# Altium PCB High_v3.PcbDoc
Units mm, origin at the board's own origin, x right, y up, seen from the top; angles counter-clockwise.
Board outline 56.79 x 56.79 mm, 2 copper layers (Top Layer, Bottom Layer); 36 components, 47 nets, 132 pads, 37 vias.
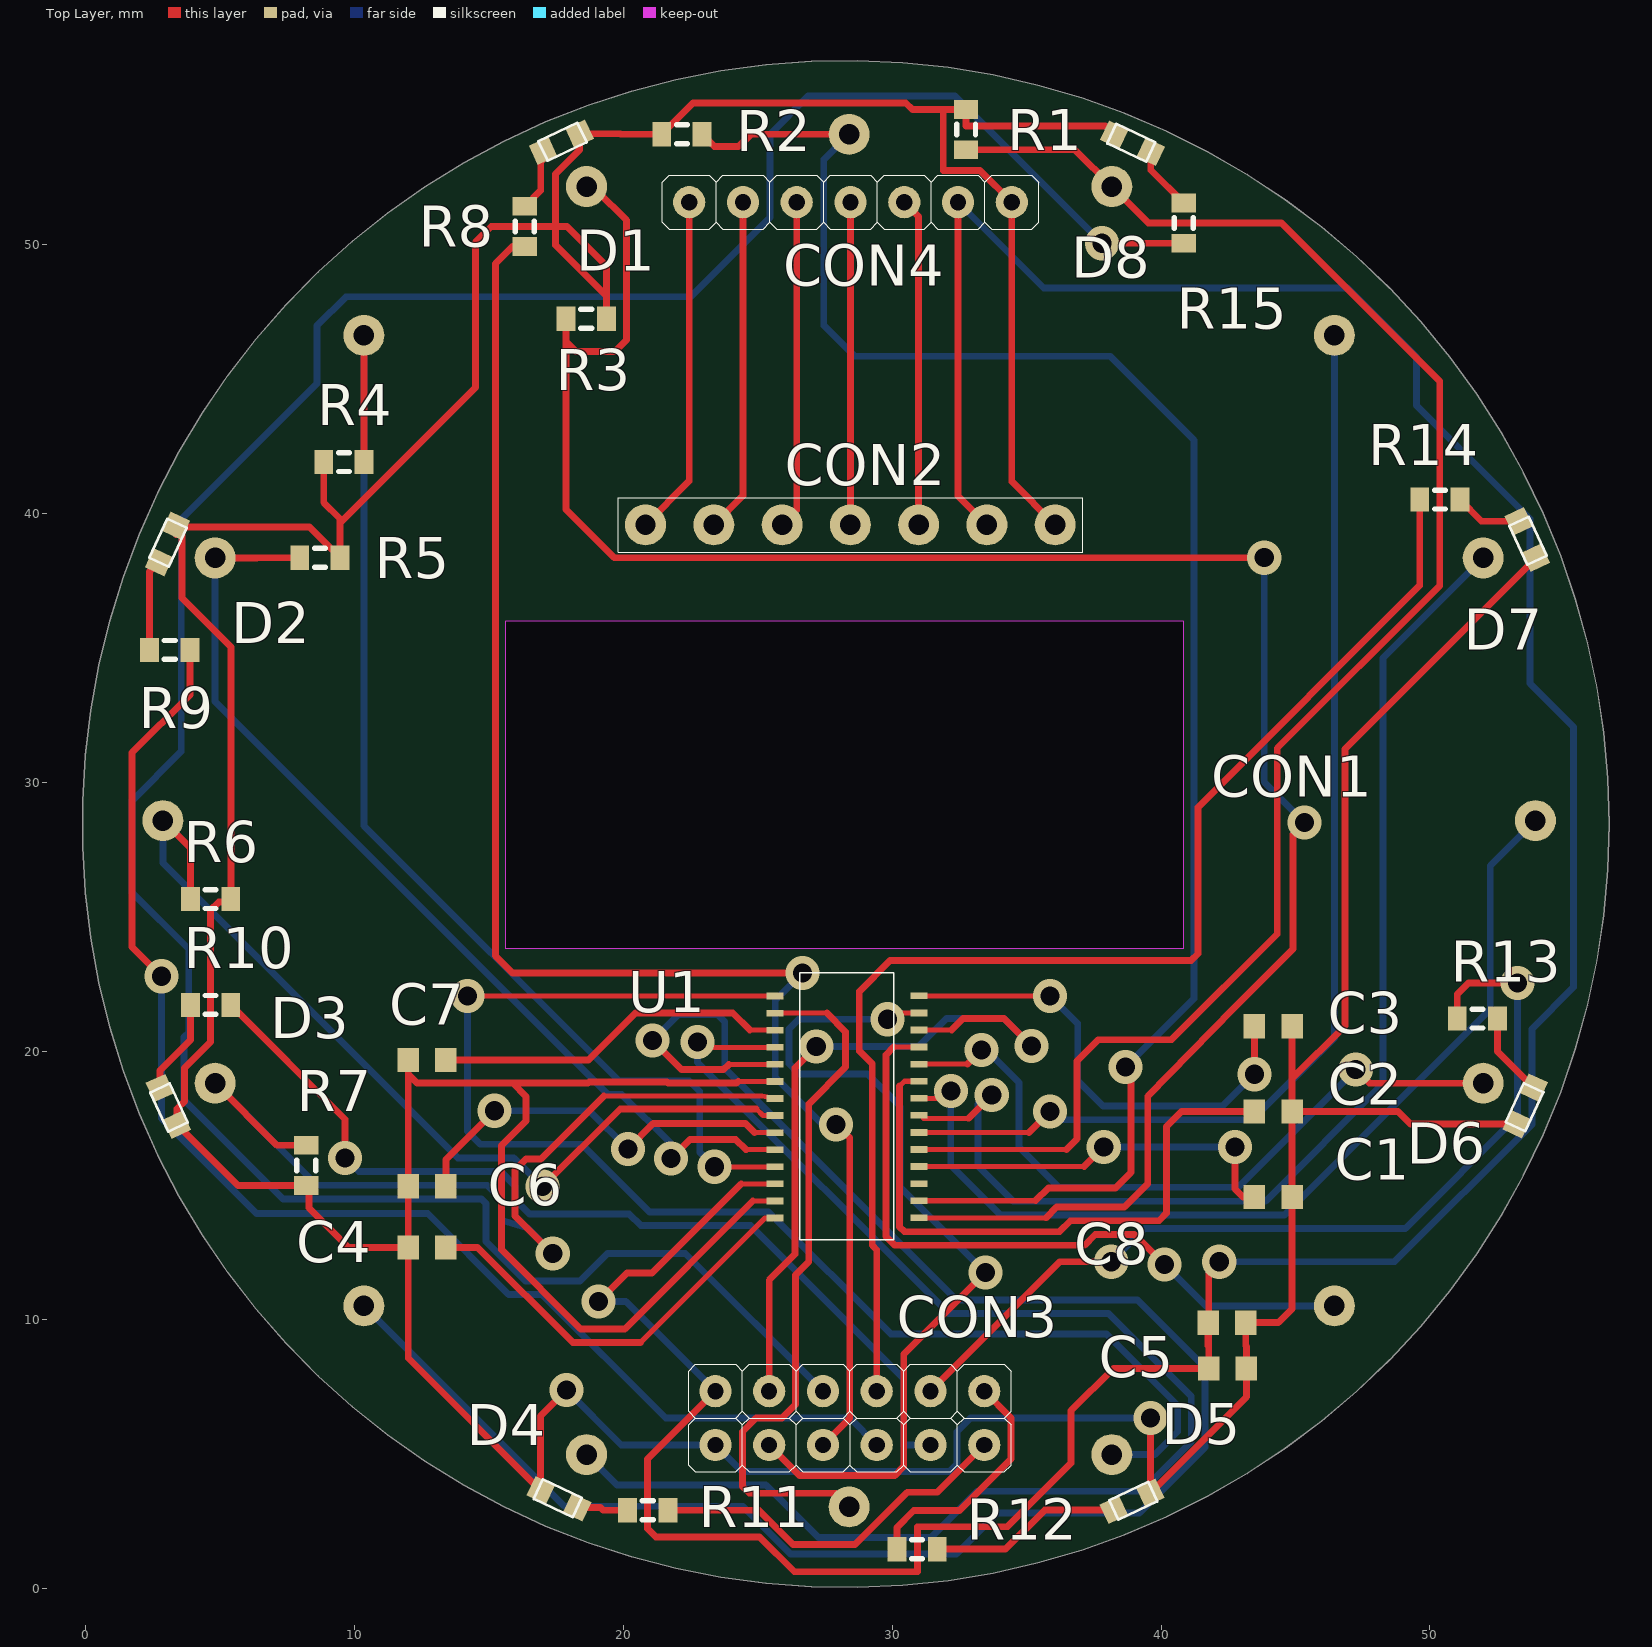
[diagram p0: Top Layer view]
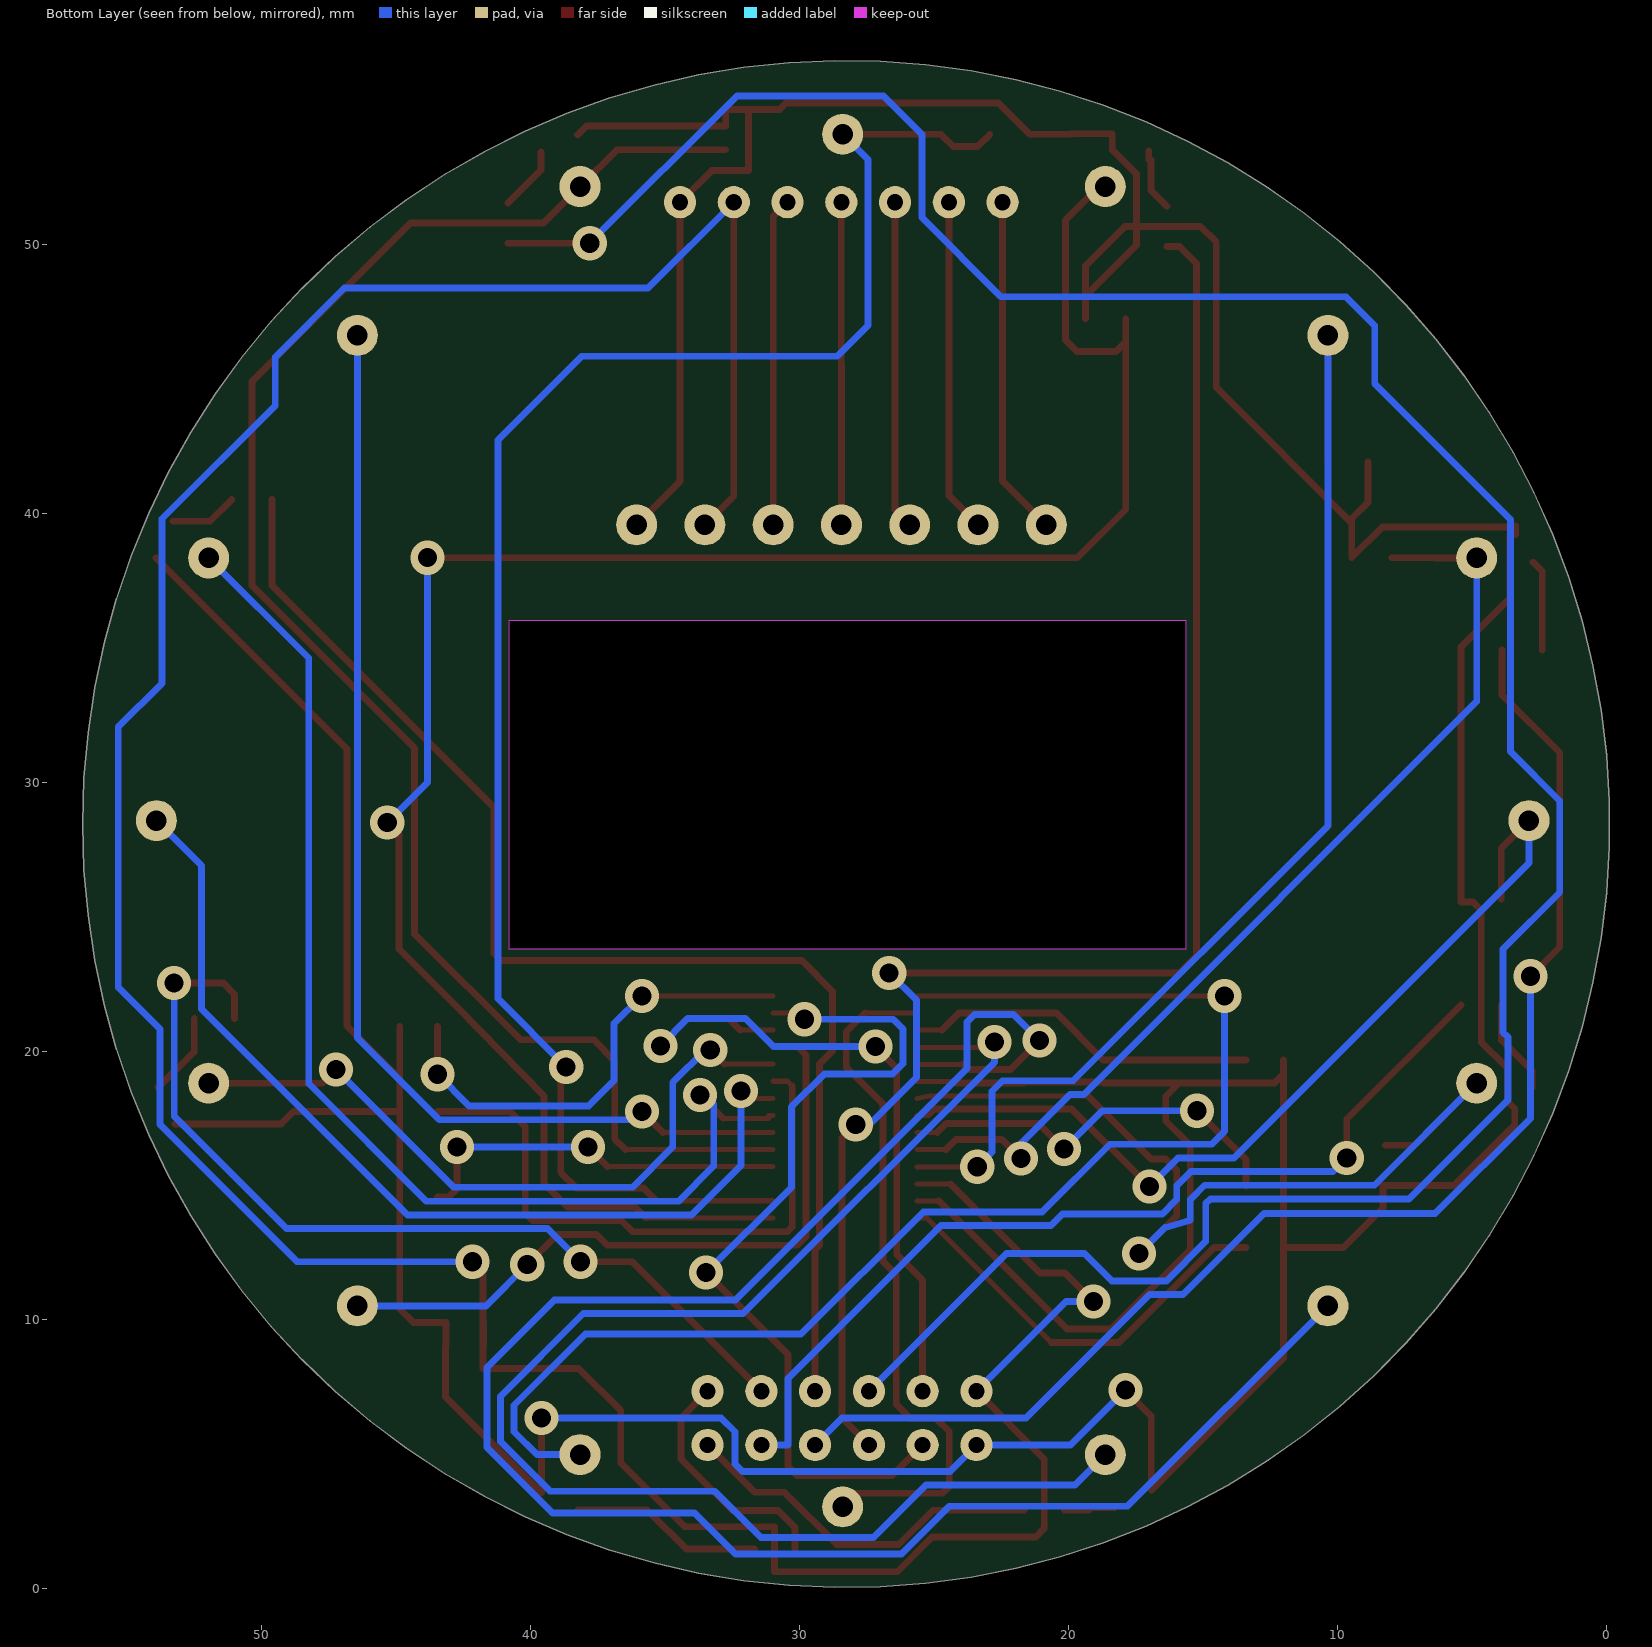
[diagram p1: Bottom Layer view, seen from below]

## Layer stack, top to bottom
Top Solder: solder mask 0.0102, Solder Resist, Dk 3.5
Top Layer: signal copper 0.0356
Dielectric 1: dielectric 0.32, FR-4, Dk 4.8
Bottom Layer: signal copper 0.0356
Bottom Solder: solder mask 0.0102, Solder Resist, Dk 3.5

## Board outline
56.673,28.448 56.622,30.146 56.47,31.839 56.217,33.519 55.863,35.181 55.411,36.819 54.862,38.427 54.218,39.999 53.48,41.53 52.653,43.014 51.738,44.446 50.739,45.821 49.66,47.133 48.504,48.379 47.276,49.553 45.98,50.652 44.621,51.671 43.202,52.607 41.731,53.457 40.211,54.217 38.649,54.885 37.049,55.458 35.418,55.934 33.761,56.313 32.085,56.591 30.395,56.769 28.698,56.845 26.999,56.819 25.304,56.692 23.621,56.464 21.953,56.136 20.309,55.708 18.693,55.183 17.111,54.563 15.569,53.848 14.073,53.043 12.628,52.15 11.238,51.172 9.91,50.112 8.647,48.975 7.454,47.765 6.336,46.485 5.297,45.141 4.34,43.737 3.468,42.278 2.685,40.77 1.994,39.218 1.397,37.627 0.896,36.003 0.494,34.353 0.19,32.681 -0.013,30.994 -0.114,29.298 -0.114,27.598 -0.013,25.902 0.19,24.215 0.494,22.543 0.896,20.893 1.397,19.269 1.994,17.678 2.685,16.126 3.468,14.618 4.34,13.159 5.297,11.755 6.336,10.411 7.454,9.131 8.647,7.921 9.91,6.784 11.238,5.724 12.628,4.746 14.073,3.853 15.569,3.048 17.111,2.333 18.693,1.713 20.309,1.188 21.953,0.76 23.621,0.432 25.304,0.204 26.999,0.077 28.698,0.051 30.395,0.127 32.085,0.305 33.761,0.583 35.418,0.961 37.049,1.438 38.649,2.011 40.211,2.679 41.731,3.439 43.202,4.289 44.621,5.225 45.98,6.244 47.276,7.343 48.504,8.517 49.66,9.763 50.739,11.075 51.738,12.45 52.653,13.882 53.48,15.366 54.218,16.897 54.862,18.469 55.411,20.077 55.863,21.715 56.217,23.377 56.47,25.057 56.622,26.75
cut-out: 15.625,23.8 15.625,36 40.825,36 40.825,23.8

## Design rules (kind name [scope] priority, off if disabled: settings)
Clearance [All] p1: gap=0.254
PolygonConnect [All] p1: connectstyle=Relief reliefconductorwidth=0.254 reliefentries=4 polygonreliefangle="90 Angle" airgapwidth=0.254
RoutingVias [All] p1: holewidth=0.711 width=1.27 viastyle="Through Hole" minholewidth=0.711 minwidth=1.27 maxholewidth=0.711 maxwidth=1.27
SMDNeckDown [All] p1: percent=75.000
SolderMaskExpansion [All] p1: expansion=0.102
Width [All] p1: maxlimit=0.254 minlimit=0.254 preferedwidth=0.254
29 further rules are at their usual default settings.

## Components (designator, comment, footprint, x,y, rotation, side; value= is the part's Value field where it differs from the comment)
C1 "Cap Semi" 1608[0603] 44.175,14.575 r180 top
C2 "Cap Semi" 1608[0603] 44.175,17.75 r180 top
C3 "Cap Semi" 1608[0603] 44.175,20.925 r180 top
C4 "Cap Semi" 1608[0603] 12.7,12.7 r180 top
C5 "Cap Semi" 1608[0603] 42.45,9.9 r180 top
C6 "Cap Semi" 1608[0603] 12.7,14.975 r0 top
C7 "Cap Semi" 1608[0603] 12.7,19.675 r0 top
C8 "Cap Semi" 1608[0603] 42.475,8.2 r180 top
CON1 "RoundSensorCon" RoundSensorCon 28.4,28.575 r0 top
CON2 "OLED" OLED 20.825,39.575 r0 top
CON3 "PIPE" PIPE_SMALL 28.425,6.35 r0 top
CON4 "OLED" OLED_SNMALL 28.45,51.575 r0 top
D1 "LED2" LED0603 16.843,53.848 r25 top
D2 "LED2" LED0603 2.365,38.354 r65 top
D3 "LED2" LED0603 3.127,18.796 r295 top
D4 "LED2" LED0603 18.113,2.667 r155 top
D5 "LED2" LED0603 38.075,3.3 r25 top
D6 "LED2" LED0603 54.225,18.475 r245 top
D7 "LED2" LED0603 53.673,39.878 r295 top
D8 "LED2" LED0603 39.449,53.086 r155 top
R1 "Res3" J1-0603 32.75,54.275 r270 top
R2 "Res3" J1-0603 22.177,54.102 r0 top
R3 "Res3" J1-0603 18.621,47.244 r180 top
R4 "Res3" J1-0603 9.604,41.91 r0 top
R5 "Res3" J1-0603 8.715,38.354 r180 top
R6 "Res3" J1-0603 4.651,25.654 r180 top
R7 "Res3" J1-0603 8.207,15.748 r90 top
R8 "Res3" J1-0603 16.335,50.673 r90 top
R9 "Res3" J1-0603 3.127,34.925 r180 top
R10 "Res3" J1-0603 4.651,21.717 r180 top
R11 "Res3" J1-0603 20.907,2.921 r180 top
R12 "Res3" J1-0603 30.925,1.475 r0 top
R13 "Res3" J1-0603 51.768,21.209 r0 top
R14 "Res3" J1-0603 50.371,40.513 r0 top
R15 "Res3" J1-0603 40.846,50.8 r90 top
U1 "TTP229-BSF" SSOP-28 31,13.8 r180 top

## Footprints (in the part's own frame and the unit in brackets; to place one, negate y for a bottom-side part, rotate by r counter-clockwise, add the part's x,y. Pads: shape width x height; smd on the part's side, far side on the other; paste and mask are expansions set on the pad)
1608[0603] [mm] "Chip Capacitor, Body 1.6x0.8mm, IPC High Density"
  rect 0.8x0.9 smd: 1(-0.7,0) 2(0.7,0)
  body extent -0.87,-0.48 0.87,0.48, height 1.3
J1-0603 [mm] "Chip Resistor, Body 1.6x0.8mm, IPC High Density"
  rect 0.7x0.9 smd: 1(-0.75,0) 2(0.75,0)
  silkscreen extent -0.2,-0.35 0.2,0.35, body extent -0.85,-0.48 0.85,0.48, height 0.9
LED0603 [mm]
  rect 0.8x0.8 smd: 1(0,-0.4) 2(1.5,-0.4)
  silkscreen extent 0,-0.8 1.6,0
OLED [mil]
  round 60 hole 30: 1(0,0) 2(100,0) 3(200,0) 4(300,0) 5(400,0) 6(500,0) 7(600,0)
  silkscreen extent -40,-40 640,40
OLED_SNMALL [mm]
  round 1.2 hole 0.6: 1(-6,0) 2(-4,0) 3(-2,0) 4(0,0) 5(2,0) 6(4,0) 7(6,0)
  silkscreen extent -7,-1 7,1
PIPE_SMALL [mm]
  round 1.2 hole 0.6: 1(-5,-1) 2(-3,-1) 3(-1,-1) 4(1,-1) 5(3,-1) 6(5,-1) 7(5,1) 8(3,1) 9(1,1) 10(-1,1) 11(-3,1) 12(-5,1)
  silkscreen extent -6,-2 6,2
RoundSensorCon [mil]
  round 60 hole 30: 1(710.64,710.64) 2(384.6,928.5) 3(0,1005) 4(-384.6,928.5) 5(-710.64,710.64) 6(-928.5,384.6) 7(-1005,0) 8(-928.5,-384.6) 9(-710.64,-710.64) 10(-384.6,-928.5) 11(0,-1005) 12(384.6,-928.5) 13(710.64,-710.64) 14(928.5,-384.6) 15(1005,0) 16(928.5,384.6)
  Top Layer lines w0.39: -384.6,928.5 -368.99,922.03
SSOP-28 [mm]
  rect 0.635x0.25 smd: 1(0,0) 2(0,-0.635) 3(0,-1.27) 4(0,-1.905) 5(0,-2.54) 6(0,-3.175) 7(0,-3.81) 8(0,-4.445) 9(0,-5.08) 10(0,-5.715) 11(0,-6.35) 12(0,-6.985) 13(0,-7.62) 14(0,-8.255) 15(5.365,-8.248) 16(5.365,-7.613) 17(5.365,-6.978) 18(5.365,-6.343) 19(5.365,-5.708) 20(5.365,-5.073) 21(5.365,-4.438) 22(5.365,-3.803) 23(5.365,-3.168) 24(5.365,-2.533) 25(5.365,-1.898) 26(5.365,-1.263) 27(5.365,-0.628) 28(5.365,0.007)
  silkscreen extent 0.95,-9.12 4.44,0.82

## Part data
C1 C2 C3 C4 C5 C6 C7 C8: "Capacitor (Semiconductor SIM Model)"
D1 D2 D3 D4 D5 D6 D7 D8: "Typical RED, GREEN, YELLOW, AMBER GaAs LED"
R1 R2 R3 R4 R5 R6 R7 R8 R9 R10 R11 R12 R13 R14 R15: "Resistor"

## Via types
v1: diameter 1.27, hole 0.711, Top Layer to Bottom Layer, 37 vias

## Nets (pads, with @x,y where several pads share a name; then routed paths per layer and width w, separated by ;. In a path a pad name is that pad's centre, name@x,y a point inside that pad or via, vN(x,y) a via of type N, cw(c..) or ccw(c..) an arc to the next point about the centre after c; other vN are vias at no path point)
GND: C1.1 C2.1 C3.1 C4.2 C5.1 C6.1 C7.1 C8.1 CON2.7 CON3.1 CON4.7 D1.2 D2.2 D3.2 D4.2 D5.2 D6.2 D7.2 D8.2 R1.1 R2.1 R3.1 R4.1 R5.1 R6.1 R7.1 U1.20 U1.27 | length 247.7
  Top Layer w0.188: 24.272,18.873 U1.20 ; 24.814,14.428 U1.27
  Top Layer w0.254: D2.2 D2.2@3.361,39.497 ; R4.1 8.854,40.413 9.465,39.802 9.465,39.649 ; C7.1 12,19.14 ; v1(17.882,7.391) 16.923,6.432 D4.2 12,8.586 C4.2 ; R3.1 19.371,48.082 ; 24.272,18.873 24.209,18.809 21.667,18.809 21.625,18.851 18.73,18.851 18.688,18.809 15.887,18.809 ; 24.814,14.428 20.054,9.668 18.415,9.668 15.469,12.614 15.469,16.492 16.383,17.406 16.383,18.313 15.887,18.809 ; CON2.7 34.45,41.19 CON4.7 33.269,52.756 31.902,52.756 31.902,55.025 ; D8.2 37.934,54.407 32.75,54.407 R1.1 31.902,55.025 ; v1(39.604,6.35) D5.2 43.175,7.143 C8.1 43.175,9.017 43.15,9.042 C5.1 44.361,9.9 44.875,10.414 C1.1 C2.1 ; C3.1 44.875,18.978 ; D6.2 49.284,17.285 48.819,17.75 C2.1 ; D7.2 46.838,31.243 46.838,20.941 44.875,18.978 ; D2.2@3.361,39.497 8.322,39.497 R5.1 9.465,39.649 ; D2.2@3.361,39.497 3.361,39.218 3.581,39.218 3.581,36.855 5.401,35.036 R6.1 5.401,25.552 4.953,25.552 4.648,25.248 4.648,20.345 3.673,19.37 3.673,18.131 3.398,17.856 D3.2 5.668,14.998 R7.1 8.306,14.998 8.306,14.173 9.779,12.7 C4.2 ; 9.465,39.649 14.503,44.688 14.503,50.089 15.088,50.673 17.475,50.673 ; C4.2 12,13.818 C6.1 12,19.14 ; 12,19.14 12.331,18.809 15.887,18.809 ; 17.475,50.673 17.475,49.978 19.371,48.082 ; 17.475,50.673 17.475,52.619 18.372,53.516 D1.2 19.888,54.119 19.906,54.102 R2.1 22.595,55.27 30.505,55.27 30.751,55.025 31.902,55.025 ; 17.475,50.673 17.907,50.673 19.371,49.209 19.371,48.082 ; C2.1 44.875,18.978
  Bottom Layer w0.254: v1(17.882,7.391) 19.923,5.35 CON3.1 24.406,4.369 32.131,4.369 32.41,4.648 32.41,5.842 32.918,6.35 v1(39.604,6.35)
NetC1_2: C1.2 U1.4 | length 14.5
  Top Layer w0.188: U1.4 37.143,15.705
  Top Layer w0.254: 37.143,15.705 v1(37.871,16.434) ; v1(42.748,16.434) 42.748,14.88 43.053,14.575 C1.2
  Bottom Layer w0.254: v1(37.871,16.434) v1(42.748,16.434)
NetC2_2: C2.2 U1.9 | length 23
  Top Layer w0.188: 30.277,18.702 30.455,18.88 U1.9
  Top Layer w0.254: 30.277,18.702 30.277,13.462 30.455,13.284 36.22,13.284 36.627,13.691 39.929,13.691 40.208,13.97 40.208,17.191 40.767,17.75 C2.2
NetC3_2: C3.2 U1.14 | length 17.7
  Top Layer w0.188: U1.14 v1(35.87,22.055)
  Top Layer w0.254: v1(43.475,19.141) C3.2
  Bottom Layer w0.254: v1(35.87,22.055) 36.9,21.025 36.9,18.905 37.847,17.958 42.292,17.958 v1(43.475,19.141)
NetC4_1: C4.1 U1.28 | length 15.6
  Top Layer w0.188: 20.64,9.16 25.273,13.793 U1.28
  Top Layer w0.254: C4.1 14.58,12.7 18.12,9.16 20.64,9.16
NetC6_2: C6.2 U1.23 | length 15.1
  Top Layer w0.188: 24.884,16.968 U1.23
  Top Layer w0.254: C6.2 13.4,15.965 v1(15.215,17.78) ; v1(20.168,16.358) 21.112,17.302 24.55,17.302 24.884,16.968
  Bottom Layer w0.254: v1(15.215,17.78) 18.745,17.78 v1(20.168,16.358)
NetC7_2: C7.2 U1.17 | length 13.2
  Top Layer w0.188: 24.704,20.778 U1.17
  Top Layer w0.254: C7.2 18.71,19.675 20.447,21.412 24.07,21.412 24.704,20.778
NetCON1_1: CON1.1 U1.6 | length 43.3
  Top Layer w0.188: U1.6 35.085,16.975
  Top Layer w0.254: 35.085,16.975 v1(35.865,17.755)
  Bottom Layer w0.254: v1(35.865,17.755) 36.17,17.45 43.409,17.45 46.45,20.492 CON1.1
NetCON1_2: CON1.2 R1.2 U1.5 | length 62.6
  Top Layer w0.188: U1.5 36.482,16.34
  Top Layer w0.254: R1.2 36.803,53.525 CON1.2 39.528,50.8 44.475,50.8 50.368,44.907 50.368,37.313 44.323,31.267 44.323,24.359 40.39,20.426 37.668,20.426 36.881,19.638 36.881,16.739 36.482,16.34
NetCON1_3: CON1.3 R2.2 U1.2 | length 65.6
  Top Layer w0.188: U1.2 35.339,14.435
  Top Layer w0.254: R2.2 23.385,53.644 24.287,53.644 24.745,54.102 CON1.3 ; 35.339,14.435 35.814,14.91 38.303,14.91 38.887,15.494 38.887,19.206 v1(38.684,19.41)
  Bottom Layer w0.254: CON1.3 27.457,53.159 27.457,46.99 28.6,45.847 38.1,45.847 41.224,42.723 41.224,21.95 v1(38.684,19.41)
NetCON1_4: CON1.4 R3.2 U1.1 | length 77.7
  Top Layer w0.188: U1.1 35.72,13.8
  Top Layer w0.254: R3.2 17.871,46.391 ; CON1.4@19.028,51.995 20.117,50.906 20.117,46.457 19.685,46.025 18.237,46.025 17.871,46.391 ; 35.72,13.8 36.119,14.199 38.633,14.199 39.508,15.073 39.508,18.324 42.694,21.59 44.907,23.803 44.907,28.067 v1(45.339,28.499) ; v1(43.84,38.354) 19.66,38.354 17.871,40.143 17.871,46.391
  Bottom Layer w0.254: v1(43.84,38.354) 43.84,29.997 v1(45.339,28.499)
NetCON1_5: CON1.5 R4.2 U1.25 | length 44.8
  Top Layer w0.188: v1(23.393,15.698) U1.25
  Top Layer w0.254: CON1.5 10.35,44.251 10.354,44.247 R4.2
  Bottom Layer w0.254: CON1.5 10.35,28.381 19.833,18.898 22.451,18.898 22.841,18.507 22.841,16.25 v1(23.393,15.698)
NetCON1_6: CON1.6 R5.2 U1.24 | length 37.1
  Top Layer w0.188: 24.562,16.333 U1.24
  Top Layer w0.254: CON1.6 6.375,38.344 6.386,38.354 R5.2 ; v1(21.768,16.002) 22.48,16.714 24.181,16.714 24.562,16.333
  Bottom Layer w0.254: CON1.6 4.816,33.004 19.431,18.39 19.939,18.39 21.768,16.561 v1(21.768,16.002)
NetCON1_7: CON1.7 R6.2 U1.22 | length 34
  Top Layer w0.188: 24.946,17.853 25.196,17.603 U1.22
  Top Layer w0.254: CON1.7 3.901,27.547 R6.2 ; v1(16.993,14.961) 19.885,17.853 24.946,17.853
  Bottom Layer w0.254: CON1.7 2.873,26.997 13.843,16.027 15.926,16.027 v1(16.993,14.961)
NetCON1_8: CON1.8 R7.2 U1.21 | length 34.4
  Top Layer w0.188: 19.275,18.328 25.163,18.328 U1.21
  Top Layer w0.254: CON1.8 7.124,16.498 R7.2 ; v1(17.374,12.471) 15.977,13.868 15.977,15.577 16.383,15.984 16.93,15.984 19.275,18.328
  Bottom Layer w0.254: CON1.8 8.611,15.011 14.935,15.011 15.469,14.478 15.469,13.716 16.408,13.437 v1(17.374,12.471)
NetCON1_9: CON1.9 U1.19 | length 72.2
  Top Layer w0.188: 23.922,19.508 U1.19
  Top Layer w0.254: v1(21.082,20.396) 22.161,19.317 23.731,19.317 23.922,19.508
  Bottom Layer w0.254: CON1.9 17.801,3.073 24.435,3.073 26.213,1.295 32.385,1.295 33.909,2.819 39.192,2.819 41.636,5.263 41.636,8.234 39.125,10.744 32.385,10.744 23.774,19.355 23.774,21.082 23.495,21.361 22.047,21.361 v1(21.082,20.396)
NetCON1_10: CON1.10 U1.18 | length 54.2
  Top Layer w0.188: v1@22.961,20.143 U1.18
  Top Layer w0.254: v1(22.758,20.345) v1@22.961,20.143
  Bottom Layer w0.254: CON1.10 19.762,3.861 25.298,3.861 27.254,1.905 31.445,1.905 33.172,3.632 39.287,3.632 41.128,5.473 41.128,7.158 38.049,10.236 32.106,10.236 22.758,19.583 v1(22.758,20.345)
NetCON1_11: CON1.11 U1.16 | length 26.3
  Top Layer w0.188: U1.16 27.574,21.413
  Top Layer w0.254: 27.574,21.413 28.269,20.717 28.269,19.405 26.899,18.034 26.899,12.167 26.406,11.674 26.406,6.858 25.898,6.35 24.943,6.35 24.435,5.842 24.435,3.81 24.689,3.556 27.892,3.556 CON1.11
NetCON1_12: CON1.12 U1.15 | length 50.9
  Top Layer w0.188: v1(14.199,22.048) U1.15
  Bottom Layer w0.254: v1(14.199,22.048) 14.199,17.018 14.681,16.535 18.466,16.535 20.98,14.022 25.402,14.022 29.95,9.474 37.973,9.474 40.62,6.828 40.62,5.842 39.769,4.991 CON1.12
NetCON1_13: CON1.13 U1.11 | length 26.2
  Top Layer w0.188: 30.056,20.15 U1.11
  Top Layer w0.254: 30.056,20.15 29.769,19.863 29.769,13.106 30.099,12.776 37.147,12.776 37.554,13.183 39.014,13.183 v1(40.132,12.065)
  Bottom Layer w0.254: v1(40.132,12.065) 41.672,10.525 CON1.13
NetCON1_14: CON1.14 U1.10 | length 26.7
  Top Layer w0.188: U1.10 32.799,19.515
  Top Layer w0.254: 32.799,19.515 v1(33.325,20.041) ; v1(47.244,19.314) 47.752,18.806 CON1.14
  Bottom Layer w0.254: v1(33.325,20.041) 33.508,20.041 34.722,18.827 34.722,16.425 36.212,14.935 42.865,14.935 v1(47.244,19.314)
NetCON1_15: CON1.15 U1.8 | length 35.8
  Top Layer w0.188: U1.8 v1@31.91,18.245
  Top Layer w0.254: v1@31.91,18.245 v1(32.182,18.517)
  Bottom Layer w0.254: v1(32.182,18.517) 32.182,15.748 34.023,13.906 44.59,13.906 52.248,21.565 52.248,26.896 CON1.15
NetCON1_16: CON1.16 U1.7 | length 44.6
  Top Layer w0.188: U1.7 31.166,17.61 31.166,17.501 32.842,17.501
  Top Layer w0.254: 32.842,17.501 v1(33.706,18.364)
  Bottom Layer w0.254: v1(33.706,18.364) 33.528,18.364 33.198,18.034 33.198,15.723 34.506,14.414 43.878,14.414 48.26,18.796 48.26,34.62 CON1.16
NetCON2_1: CON2.1 CON4.1 | length 12.7
  Top Layer w0.254: CON2.1 22.45,41.2 CON4.1
NetCON2_2: CON2.2 CON4.2 | length 12.4
  Top Layer w0.254: CON2.2 24.45,40.66 CON4.2
NetCON2_3: CON2.3 CON4.3 | length 12.2
  Top Layer w0.254: CON2.3 26.45,40.12 CON4.3
NetCON2_4: CON2.4 CON4.4 | length 12
  Top Layer w0.254: CON2.4 28.445,45.568 28.45,45.573 CON4.4
NetCON2_5: CON2.5 CON4.5 | length 12.2
  Top Layer w0.254: CON4.5 30.985,51.04 CON2.5
NetCON3_2: CON3.2 U1.13 | length 32.8
  Top Layer w0.188: v1@30.056,21.42 U1.13
  Top Layer w0.254: CON3.2 26.559,4.216 30.099,4.216 30.429,4.547 30.429,8.712 v1(33.477,11.76) ; v1(29.82,21.184) v1@30.056,21.42
  Bottom Layer w0.254: v1(29.82,21.184) 26.518,21.184 26.162,20.828 26.162,19.533 26.543,19.152 29.083,19.152 30.302,17.932 30.302,14.935 v1(33.477,11.76)
NetCON3_3: CON3.3 R8.1 | length 58.6
  Top Layer w0.254: R8.1 15.875,49.923 15.24,49.288 15.24,23.546 15.875,22.911 v1(26.67,22.911) ; CON3.3 28.423,6.348 28.423,16.764 v1(27.915,17.272)
  Bottom Layer w0.254: v1(26.67,22.911) 25.654,21.895 25.654,19.025 27.407,17.272 v1(27.915,17.272)
NetCON3_4: CON3.4 R9.1 | length 50.4
  Top Layer w0.254: v1(2.819,22.784) 1.727,23.876 1.727,31.099 3.877,33.249 R9.1
  Bottom Layer w0.254: v1(2.819,22.784) 2.819,17.501 6.361,13.959 12.726,13.959 15.737,10.947 16.98,10.947 21.578,6.35 28.425,6.35 CON3.4
NetCON3_5: CON3.5 R10.1 | length 35.4
  Top Layer w0.254: R10.1 9.652,17.466 v1(9.652,16.027)
  Bottom Layer w0.254: v1(9.652,16.027) 10.16,15.519 15.443,15.519 15.977,14.986 15.977,14.478 16.51,13.945 20.218,13.945 20.649,13.514 24.739,13.514 30.429,7.823 30.429,5.35 CON3.5
NetCON3_6: CON3.6 R11.1 | length 13.8
  Top Layer w0.254: R11.1 25.044,2.921 26.314,1.651 28.619,1.651 30.558,3.589 31.664,3.589 CON3.6
NetCON3_7: CON3.7 R12.1 | length 9
  Top Layer w0.254: R12.1 30.175,2.286 30.802,2.913 32.504,2.913 34.417,4.826 34.417,6.358 CON3.7
NetCON3_8: CON3.8 R13.1 | length 34.4
  Top Layer w0.254: CON3.8 36.242,12.167 v1(38.151,12.167) ; R13.1 51.018,22.113 51.435,22.53 v1(53.266,22.53)
  Bottom Layer w0.254: v1(38.151,12.167) 39.383,13.399 49.085,13.399 53.266,17.579 v1(53.266,22.53)
NetCON3_9: CON3.9 R14.1 | length 48.6
  Top Layer w0.254: CON3.9 29.425,12.612 29.261,12.776 29.261,19.516 28.777,19.999 28.777,22.224 29.921,23.368 41.123,23.368 41.377,23.622 41.377,29.068 49.621,37.313 R14.1
NetCON3_10: CON3.10 R15.1 | length 102.4
  Top Layer w0.254: v1(37.809,50.05) R15.1
  Bottom Layer w0.254: CON3.10 22.304,12.471 19.406,12.471 18.39,11.455 16.358,11.455 14.896,12.917 14.896,14.327 14.72,14.503 7.341,14.503 3.658,18.186 3.658,20.523 3.835,20.701 3.835,23.8 1.727,25.908 1.727,29.312 3.556,31.14 3.556,39.776 8.611,44.831 8.611,46.99 9.677,48.057 22.504,48.057 25.451,51.003 25.451,54.102 26.873,55.524 32.334,55.524 v1(37.809,50.05)
NetCON3_11: CON3.11 U1.12 | length 27.2
  Top Layer w0.188: U1.12 32.215,20.785
  Top Layer w0.254: CON3.11 25.425,11.48 26.391,12.446 26.391,19.38 v1(27.178,20.168) ; 32.215,20.785 32.639,21.209 34.163,21.209 v1(35.179,20.193)
  Bottom Layer w0.254: v1(27.178,20.168) 30.978,20.168 32.019,21.209 34.163,21.209 v1(35.179,20.193)
NetD1_1: D1.1 R8.2 | length 2.4
  Top Layer w0.254: R8.2 16.926,52.014 16.926,53.157 17.012,53.157 D1.1
NetD2_1: D2.1 R9.2 | length 3.4
  Top Layer w0.254: R9.2 2.377,37.834 D2.1
NetD3_1: D3.1 R10.2 | length 3.6
  Top Layer w0.254: D3.1 2.764,19.274 3.901,20.411 R10.2
NetD4_1: D4.1 R11.2 | length 1.9
  Top Layer w0.254: D4.1 19.152,3.03 19.26,2.921 R11.2
NetD5_1: D5.1 R12.2 | length 7.2
  Top Layer w0.254: R12.2 34.214,1.475 35.676,2.938 D5.1
NetD6_1: D6.1 R13.2 | length 3.1
  Top Layer w0.254: R13.2 52.518,19.989 D6.1
NetD7_1: D7.1 R14.2 | length 2.5
  Top Layer w0.254: R14.2 51.925,39.709 D7.1
NetD8_1: D8.1 R15.2 | length 2.4
  Top Layer w0.254: D8.1 39.618,52.778 R15.2
VCC: C5.2 C8.2 CON2.6 CON3.12 CON4.6 U1.26 | length 129.3
  Top Layer w0.188: 24.385,15.063 U1.26
  Top Layer w0.254: v1(19.075,10.684) 20.138,11.746 21.068,11.746 24.385,15.063 ; CON3.12 20.904,4.829 20.904,2.235 21.209,1.93 25.07,1.93 26.365,0.635 30.937,0.635 30.937,2.311 34.29,2.311 36.652,4.674 36.652,6.625 38.227,8.2 C8.2 41.775,9.017 ; CON4.6 32.45,40.65 CON2.6 ; C5.2 41.75,9.042 41.775,9.017 ; v1(42.164,12.167) 41.775,11.778 41.775,9.017
  Bottom Layer w0.254: v1(19.075,10.684) 20.091,10.684 CON3.12 ; CON4.6 35.638,48.387 46.939,48.387 49.505,45.822 49.505,44.018 53.721,39.802 53.721,33.68 55.347,32.055 55.347,22.377 53.797,20.828 53.797,17.272 48.692,12.167 v1(42.164,12.167)
pads on no net: U1.3